# Altium PCB SOLOLINKER_GC2093.PcbDoc
Units mil, origin at the board's own origin, x right, y up, seen from the top; angles counter-clockwise.
Board outline 1181.1 x 866.14 mil, 2 copper layers (Top Layer, Bottom Layer); 21 components, 23 nets, 90 pads, 65 vias.
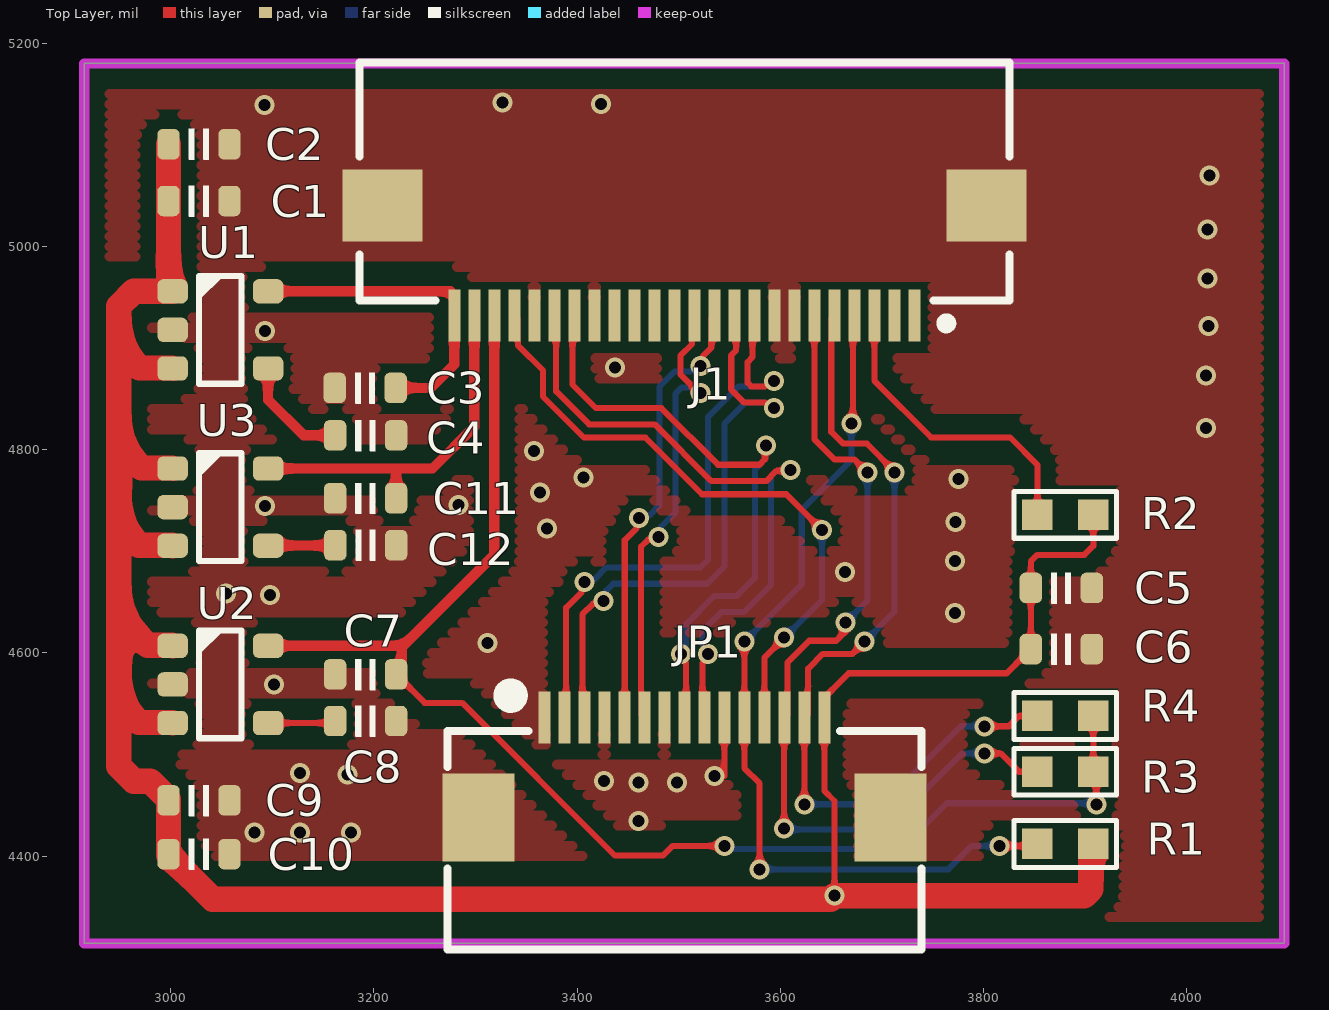
[diagram p0: Top Layer view]
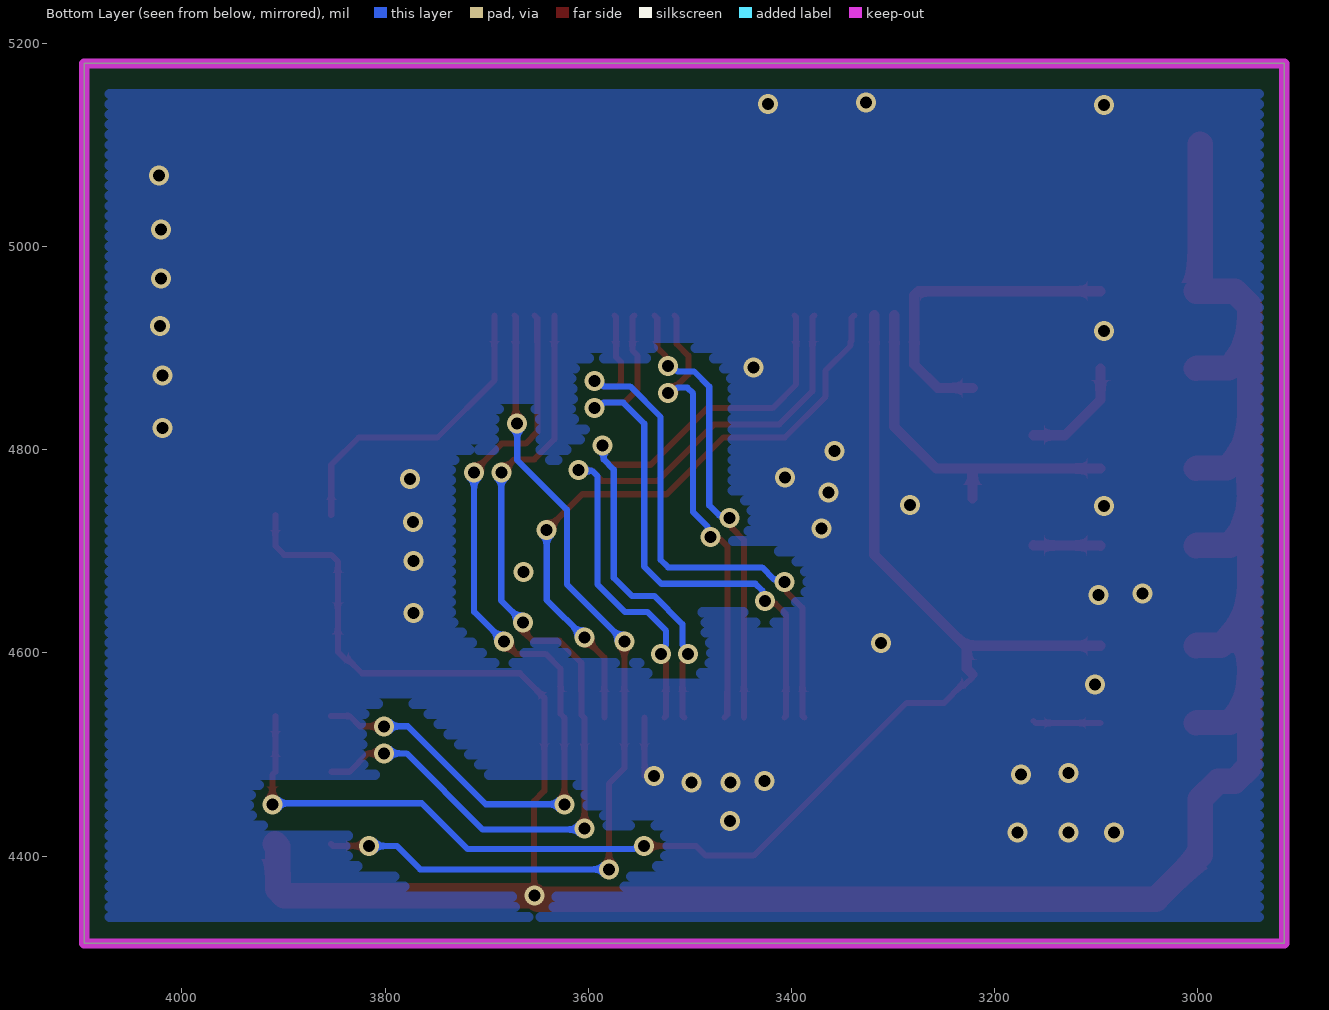
[diagram p1: Bottom Layer view, seen from below]
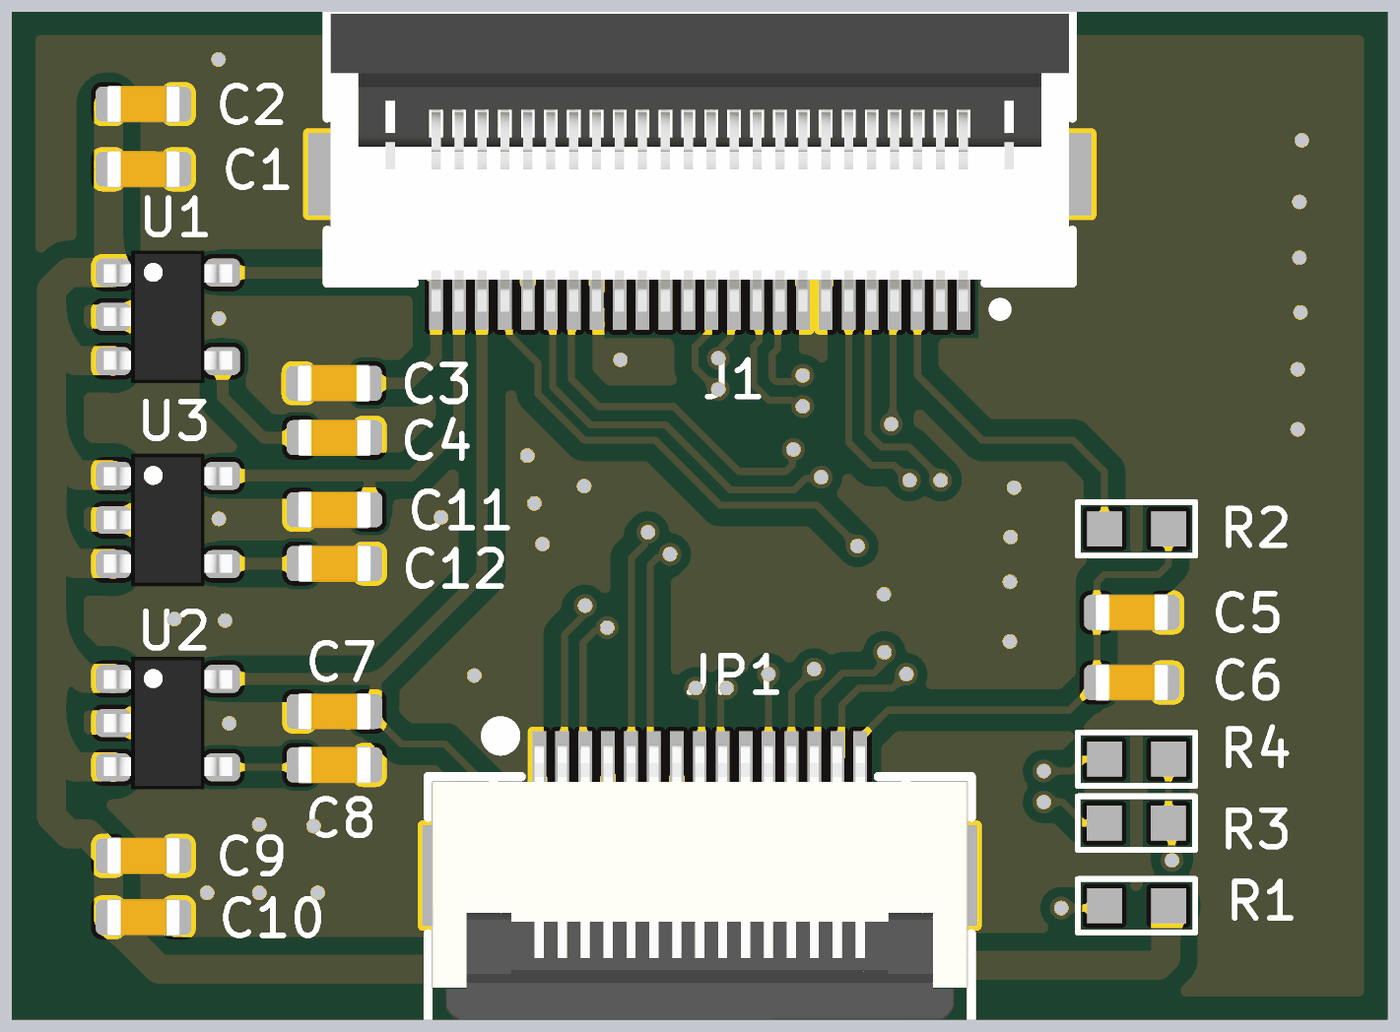
[diagram p2: 3D render of the assembled board from above, using the file's embedded part models]

## Layer stack, top to bottom
Top Solder: solder mask 0.4, Solder Resist, Dk 3.5
Top Layer: signal copper 1.4
Dielectric 1: dielectric 12.6, FR-4, Dk 4.8
Bottom Layer: signal copper 1.4
Bottom Solder: solder mask 0.4, Solder Resist, Dk 3.5

## Board outline
2915,4314 4096.1,4314 4096.1,5180.14 2915,5180.14

## Design rules (kind name [scope] priority, off if disabled: settings)
Clearance [All] p1: gap=7 ignorepadtopadclearanceinfootprint=TRUE except(0: SMDPad-Hole THPad-Hole Via-Hole Fill-Hole Poly-Hole Region-Hole Text-Hole; 15: Track-Poly Poly-Poly)
ComponentClearance ComponentClearance_1 [All] p1: gap=10 collisioncheckmode=3 verticalgap=10 showdistances=FALSE
ComponentClearance ComponentClearance_oled [InComponent('OLED1')] p2: gap=0 collisioncheckmode=3 verticalgap=0 showdistances=FALSE
DiffPairsRouting [All] p1: maxlimit=10 minlimit=6 mostfreqgap=10 toplayer_minwidth=6 toplayer_maxwidth=15 toplayer_prefwidth=10 bottomlayer_minwidth=6 bottomlayer_maxwidth=15 bottomlayer_prefwidth=10 maxuncoupledlength=500
HoleSize [All] p1: absolutevalues=TRUE maxlimit=200 minlimit=10 maxpercent=80.000 minpercent=20.000
HoleToHoleClearance [All] p1: gap=7 allowstackedmicrovias=TRUE
MinimumSolderMaskSliver [All] p1: minsoldermaskwidth=7
PlaneConnect [All] p1: planeconnectstyle=Direct reliefexpansion=20 reliefentries=4 reliefconductorwidth=10 reliefairgap=10
PolygonConnect PolygonConnect_1 [All] p1: connectstyle=Direct reliefconductorwidth=10 reliefentries=4 polygonreliefangle="90 Angle" airgapwidth=10
PolygonConnect PolygonConnect_power [InNet('Vbus')] p2: connectstyle=Direct reliefconductorwidth=10 reliefentries=4 polygonreliefangle="90 Angle" airgapwidth=10
RoutingVias [All] p1: holewidth=11.81 width=19.68 viastyle="Through Hole" minholewidth=11.81 minwidth=19.68 maxholewidth=11.81 maxwidth=100
SilkToSilkClearance [All] p1: silktosilkclearance=7
SilkToSolderMaskClearance [IsPad] p1: minsilkscreentomaskgap=7 clearancetoexposedcopper=TRUE
SolderMaskExpansion [All] p1: expansion=4 istentingtop=FALSE
UnRoutedNet [All] p1: checkbadconnections=TRUE
Width [All] p1: maxlimit=50 minlimit=6 preferedwidth=10
21 further rules are at their usual default settings.

## Classes and differential pairs
differential pair MIPI_RD3: +MIPI_RD3_P -MIPI_RD3_N
differential pair MIPI_RD2: +MIPI_RD2_P -MIPI_RD2_N
differential pair MIPI_RD1: +MIPI_RD1_P -MIPI_RD1_N
differential pair MIPI_RD0: +MIPI_RD0_P -MIPI_RD0_N
differential pair MIPI_RCLK: +MIPI_RCLK_P -MIPI_RCLK_N

## Components (designator, comment, footprint, x,y, rotation, side; value= is the part's Value field where it differs from the comment)
C1 "C0603" CAP_0603 3027.86,5044.77 r180 top value=10uF
C2 "C0603" CAP_0603 3027.86,5100.67 r180 top value=1uF
C3 "C0603" CAP_0603 3191.42,4860.88 r0 top value=10uF
C4 "C0603" CAP_0603 3191.86,4814.16 r180 top value=10nF
C5 "C0603" CAP_0603 3876.6,4664.01 r180 top value=10uF
C6 "C0603" CAP_0603 3876.6,4603.79 r180 top value=1uF
C7 "C0603" CAP_0603 3191.86,4578.9 r0 top value=10uF
C8 "C0603" CAP_0603 3191.86,4532.98 r180 top value=10nF
C9 "C0603" CAP_0603 3027.86,4454.92 r180 top value=10uF
C10 "C0603" CAP_0603 3027.86,4401.94 r180 top value=1uF
C11 "C0603" CAP_0603 3191.86,4752.23 r0 top value=10uF
C12 "C0603" CAP_0603 3192,4706 r180 top value=10nF
J1 "687124149022" 687124149022 3505.55,5064.16 r180 top
JP1 "FPC1.0-15P" "FPC0.5 2H-WS-15P" 3505.55,4437.94 r0 top
R1 "Res_0402" 0603R 3853.1,4411.97 r0 top value=?K
R2 "Res_0402" 0603R 3853.1,4735.82 r0 top value=?K
R3 "Res_0402" 0603R 3853,4483 r0 top value=?K
R4 "Res_0402" 0603R 3853.1,4537.93 r0 top value=?K
U1 "RT9193-3v3" SOT23-5 3048.86,4917.95 r0 top
U2 "RT9193-3v3" SOT23-5 3048.86,4568.98 r0 top
U3 "RT9193-3v3" SOT23-5 3048.86,4743.46 r0 top

## Footprints (in the part's own frame and the unit in brackets; to place one, negate y for a bottom-side part, rotate by r counter-clockwise, add the part's x,y. Pads: shape width x height; smd on the part's side, far side on the other; paste and mask are expansions set on the pad)
0603R [mil] "0603"
  rect 30x30 smd: 1(0,0) 2(55,0)
  silkscreen extent -23,-23 78,23, body extent -4,-15 59,15, height 19
687124149022 [mm] "0.50mm SMT ZIF Horizontal Hinge Type Bottom Contact, 24p"
  rect 0.3x1.3 smd: 1(-5.75,3.35) 2(-5.25,3.35) 3(-4.75,3.35) 4(-4.25,3.35) 5(-3.75,3.35) 6(-3.25,3.35) 7(-2.75,3.35) 8(-2.25,3.35) 9(-1.75,3.35) 10(-1.25,3.35) 11(-0.75,3.35) 12(-0.25,3.35) 13(0.25,3.35) 14(0.75,3.35) 15(1.25,3.35) 16(1.75,3.35) 17(2.25,3.35) 18(2.75,3.35) 19(3.25,3.35) 20(3.75,3.35) 21(4.25,3.35) 22(4.75,3.35) 23(5.25,3.35) 24(5.75,3.35)
  rect 2x1.8 smd: M1(-7.55,0.6) M2(7.55,0.6)
  silkscreen extent -8.12,-2.98 8.13,3.67, body extent -8.05,-2.9 8.05,3.6, height 2.25
CAP_0603 [mil]
  rrect50% 22x30 smd: 1(-30,0) 2(30,0)
  silkscreen extent -10,-15 10,15, body extent -31,-16 31,16, height 31
"FPC0.5 2H-WS-15P" [mm] "长：11.7mm，宽：5.2mm，高：2mm"
  rect 1.8x2.2 smd: 0(-5.15,0) 0(5.15,0)
  rect 0.3x1.3 smd: 1(-3.5,2.497) 2(-3,2.497) 3(-2.5,2.497) 4(-2,2.497) 5(-1.5,2.497) 6(-1,2.497) 7(-0.5,2.497) 8(0,2.497) 9(0.5,2.497) 10(1,2.497) 11(1.5,2.497) 12(2,2.497) 13(2.5,2.497) 14(3,2.497) 15(3.5,2.497)
  silkscreen extent -5.93,-3.3 5.93,3.23, body extent -5.85,-3.15 5.85,2.85, height 2
SOT23-5 [mil]
  rrect50% 30x24 smd: 1(-47,38) 2(-47,0) 3(-47,-38) 4(47,-38) 5(47,38)
  silkscreen extent -21,-53 21,53, body extent -55,-57 55,57, height 57

## Part data
C1 C2 C3 C4 C5 C6 C7 C8 C9 C10 C11 C12: "Ceramic Chip Capacitor - Standard", PackageDocument=Mar-2001, Code_IPC="1608 [0603]", Code_JEITA=0603, ComponentLink1Description="Manufacturer Link", ComponentLink1URL=http://www.kemet.com/, ComponentLink2Description=Datasheet, ComponentLink2URL=http://www.kemet.com/kemet/web/homepage/kechome.nsf/vapubfilesname/F3102TA.pdf/$file/F3102TA.pdf, DatasheetDocument=Mar-2001, LatestRevisionDate=19-Mar-2004, LatestRevisionNote="Silkscreen size reduced.", Note="Footprint corresponds to dimensions for bulk cassette packaging. This case size has tightened tolerances.", PackageReference=0603, Published=17-Jul-2002, Publisher="Altium Limited"
J1: library part CMP-1502-01633-2
JP1: library part FPC-15P, "FPC连接器", BOM名称=FPC连接器, 学习资源=www.ooocke.com, 版权归属=源创客
R1 R2 R3 R4: "Resistor"
U1 U2 U3: library part RT9193, "Power"

## Via types
v1: diameter 19.68, hole 11.81, Top Layer to Bottom Layer, tented both sides, 65 vias

## Nets (pads, with @x,y where several pads share a name; then routed paths per layer and width w, separated by ;. In a path a pad name is that pad's centre, name@x,y a point inside that pad or via, vN(x,y) a via of type N, cw(c..) or ccw(c..) an arc to the next point about the centre after c; other vN are vias at no path point)
AVDD_2V8: C3.2 J1.24 U1.5 | length 320.4
  Top Layer w10: U1.5 3275.18,4955.95 3279.17,4951.95 J1.24 3279.17,4883.81 3256.24,4860.88 C3.2
DOVDD_2V8: C7.2 J1.22 R3.2 R4.2 U2.5 | length 1403.7
  Top Layer w6: C7.2 3221.86,4576.26 3229.67,4568.45 3232.32,4568.45 3249.88,4550.89 3286.86,4550.89 3437.31,4400.44 3484.52,4400.44 3494.09,4410 v1(3545,4410) ; R4.2 3908.1,4483.1 R3.2 3911,4480 v1(3911,4451)
  Top Layer w10: U2.5 3228.98,4606.98 ; C7.2 3227.55,4584.6 3227.55,4605.55 3228.98,4606.98 ; J1.22 3318.54,4696.54 3228.98,4606.98
  Bottom Layer w6: v1(3545,4410) 3547.62,4407.38 3554.82,4407.38 3555.36,4406.84 3718.84,4406.84 3764,4452 3910,4452 v1(3911,4451)
DVDD_1V2: C11.2 J1.23 U3.5 | length 359
  Top Layer w10: U3.5 3222,4781.46 ; C11.2 3221.86,4781.33 3222,4781.46 ; J1.23 3298.86,4822.61 3257.71,4781.46 3222,4781.46
GND: C1.1 C2.1 C3.1 C4.1 C5.1 C6.1 C7.1 C8.1 C9.1 C10.1 C11.1 C12.1 J1.7 J1.8 J1.17 J1.20 J1.M1 J1.M2 JP1.0 JP1.1 JP1.4 JP1.7 JP1.10 U1.2 U2.2 U3.2 | length 67.2
  Top Layer w6: v1(3535.25,4478.69) 3544.92,4478.69 JP1.10
  other v1: 3082.5,4423.07 3127.34,4423.07 3177.5,4423.07 3460.5,4434.69 3460.25,4472.38 3498.55,4472.38 3426.5,4473.69 3174,4480.48 3127.34,4481.79 3101.5,4568.69 3311.97,4609.79 3771.92,4639.08 3098,4657.07 3054.36,4658.38 3663.64,4679.63 3771.92,4690.32 3370.5,4722.69 3772.49,4728.75 3092.62,4744.38 3283.36,4745.69 3363.5,4757.69 3775.42,4771.22 3406.25,4772.53 3357.5,4798.69 4019,4821.3 4019,4872.87 3437.45,4881.09 3092.62,4916.64 4021.45,4921.79 4020.5,4968.69 4020.5,5016.69 4022.5,5069.69 3092.36,5139.07 3423.31,5140.38 3326.5,5141.69
MCLK: J1.21 JP1.12 | length 629.2
  Top Layer w6: J1.21 3341.13,4929.36 3341.13,4907.04 3342.01,4906.16 3342.01,4902.53 3366.44,4878.1 3366.44,4852.17 3406.61,4812 3467.12,4812 3522.96,4756.16 3605.84,4756.16 v1(3641,4721) ; JP1.12 3584.29,4595.31 3603.7,4614.73 v1(3603.7,4615.27)
  Bottom Layer w6: v1(3603.7,4615.27) 3604.25,4615.27 3641,4652.02 v1(3641,4721)
MIPI_RCLK_N: J1.18 JP1.8 | length 625.7
  Top Layer w6: J1.18 3395.44,4930.43 3395.44,4864.19 3418.63,4841 3482.91,4841 3538.75,4785.16 3579.66,4785.16 3584.93,4790.42 3584.93,4802.93 v1(3586,4804) ; v1(3502.05,4599) 3502.05,4595.3 3507.39,4589.95 3507.39,4576.28 3507.39,4538.09 JP1.8
  Bottom Layer w6: v1(3502.05,4599) 3502.05,4602.7 3507.39,4608.05 3507.39,4628.35 3535.12,4656.07 3557.23,4656.07 3574.98,4673.82 3574.98,4780.47 3584.93,4790.42 3584.93,4802.93 v1(3586,4804)
MIPI_RCLK_P: J1.19 JP1.9 | length 652.2
  Top Layer w6: J1.19 3379.44,4930.43 3379.44,4857.56 3412,4825 3476.28,4825 3532.13,4769.16 3586.29,4769.16 3596.24,4779.11 3608.75,4779.11 v1(3609.82,4780.18) ; JP1.9 3523.39,4538.09 3523.39,4569.65 3523.39,4589.95 3528.74,4595.3 v1(3528.74,4599)
  Bottom Layer w6: v1(3528.74,4599) 3528.74,4602.7 3523.39,4608.05 3523.39,4621.72 3541.75,4640.07 3563.85,4640.07 3590.98,4667.2 3590.98,4773.84 3596.24,4779.11 3608.75,4779.11 v1(3609.82,4780.18)
MIPI_RD0_N: J1.9 JP1.2 | length 592.1
  Top Layer w6: JP1.2 3389.28,4538.09 3389.28,4644.47 3404.51,4659.7 3404.51,4667.25 v1(3407.13,4669.87) ; J1.9 3572.61,4930.43 3572.61,4891.05 3567.77,4886.21 3567.77,4865.86 3571.28,4862.34 3584.95,4862.34 3590.3,4867.69 v1(3594,4867.69)
  Bottom Layer w6: v1(3407.13,4669.87) 3409.75,4672.49 3417.3,4672.49 3428.92,4684.1 3521.47,4684.1 3529,4691.63 3529,4832.38 3558.96,4862.34 3584.95,4862.34 3590.3,4867.69 v1(3594,4867.69)
MIPI_RD0_P: J1.10 JP1.3 | length 592.1
  Top Layer w6: JP1.3 3405.28,4538.09 3405.28,4637.84 3415.83,4648.38 3423.38,4648.38 v1(3426,4651) ; J1.10 3556.61,4930.43 3556.61,4897.68 3551.77,4892.84 3551.77,4859.23 3564.65,4846.34 3584.95,4846.34 3590.3,4841 v1(3594,4841)
  Bottom Layer w6: v1(3426,4651) 3428.62,4653.62 3428.62,4661.17 3435.55,4668.1 3528.1,4668.1 3545,4685 3545,4825.76 3565.59,4846.34 3584.95,4846.34 3590.3,4841 v1(3594,4841)
MIPI_RD1_N: J1.11 JP1.5 | length 448.4
  Top Layer w6: JP1.5@3446.9,4536.65 3446.9,4711.08 3458.51,4722.7 3458.51,4730.25 v1(3461.13,4732.87) ; v1(3521.47,4882.4) 3524.09,4885.02 3524.09,4892.39 3532.17,4900.47 3532.17,4929.36 J1.11
  Bottom Layer w6: v1(3461.13,4732.87) 3463.75,4735.49 3471.3,4735.49 3480.97,4745.16 3480.97,4862.03 3496,4877.06 3512.43,4877.06 3517.77,4882.4 v1(3521.47,4882.4)
MIPI_RD1_P: J1.12 JP1.6 | length 459.4
  Top Layer w6: JP1.6 3463.28,4539.15 3463.28,4561.97 3462.9,4562.35 3462.9,4704.45 3469.83,4711.38 3477.38,4711.38 v1(3480,4714) ; J1.12 3513.14,4930.01 3513.14,4904.06 3501.63,4892.55 3501.63,4874.18 3520.1,4855.72 v1(3521.47,4855.72)
  Bottom Layer w6: v1(3480,4714) 3482.62,4716.62 3482.62,4724.17 3496.97,4738.53 3496.97,4855.4 3502.63,4861.06 3512.43,4861.06 3517.77,4855.72 v1(3521.47,4855.72)
MIPI_RD2_N: J1.13
MIPI_RD2_P: J1.14
MIPI_RD3_N: J1.15
MIPI_RD3_P: J1.16
NetC4_2: C4.2 U1.4 | length 111.3
  Top Layer w10: U1.4 3095.86,4849.14 3130.84,4814.16 C4.2
NetC8_2: C8.2 U2.4 | length 66.8
  Top Layer w6: U2.4 3159.86,4530.98 C8.2
NetC12_2: C12.2 U3.4 | length 66.4
  Top Layer w10: U3.4 3096.13,4705.73 3161.73,4705.73 C12.2
PWDN: J1.3 R2.1 | length 308.5
  Top Layer w6: J1.3 3692.56,4867.92 3748.48,4812 3826.16,4812 3853.1,4785.06 R2.1
RST: J1.4 JP1.11 R1.1 | length 880.1
  Top Layer w6: v1(3564.61,4611) JP1.11 3564.61,4486.67 3579.66,4471.62 v1(3579.66,4387) ; v1(3670,4825.76) 3671.44,4827.19 3671.44,4930.83 J1.4 ; v1(3816,4410) 3851.13,4410 R1.1
  Bottom Layer w6: v1(3564.61,4611) 3621.16,4667.55 3621.16,4740.99 3670,4789.84 v1(3670,4825.76) ; v1(3579.66,4387) 3765.48,4387 3788.48,4410 v1(3816,4410)
SCL: J1.6 JP1.13 R3.1 | length 875.9
  Top Layer w6: v1(3603.7,4427.13) 3603.84,4427.27 3603.84,4536.11 3606.88,4539.15 3606.88,4562.25 3606.98,4562.35 3606.98,4590.49 3628.49,4612 3654.88,4612 3664.13,4621.25 v1(3664.13,4629.87) ; J1.6 3633.5,4810.11 3653.19,4790.42 3672.77,4790.42 v1(3685.71,4777.48) ; v1(3801,4501.08) 3816.92,4501.08 3835,4483 R3.1
  Bottom Layer w6: v1(3603.7,4427.13) 3604.68,4426.16 3704,4426.16 3778.92,4501.08 v1(3801,4501.08) ; v1(3664.13,4629.87) 3685.71,4651.45 v1(3685.71,4777.48)
SDA: J1.5 JP1.14 R4.1 | length 841.3
  Top Layer w6: v1(3623.68,4451) JP1.14 3627.44,4540.02 3627.44,4584.42 3642.02,4599 3671,4599 v1(3683,4611) ; J1.5 3650.28,4929.36 3650.28,4906.29 3650.16,4906.16 3650.16,4817.54 3661.78,4805.91 3685.34,4805.91 3712.39,4778.86 v1(3712.39,4777.48) ; v1(3801,4527.77) 3824.93,4527.77 3835.1,4537.93 R4.1
  Bottom Layer w6: v1(3623.68,4451) 3701,4451 3777.77,4527.77 v1(3801,4527.77) ; v1(3683,4611) 3712.39,4640.39 v1(3712.39,4777.48)
VCC_3V3: C1.2 C2.2 C5.2 C6.2 C9.2 C10.2 JP1.15 R1.2 R2.2 U1.1 U1.3 U2.1 U2.3 U3.1 U3.3 | length 2669.1
  Top Layer w6: v1(3653.19,4361) 3653.35,4361.16 3653.35,4454.22 3643.35,4464.22 JP1.15 3643.35,4555.93 3667.42,4580 3822.81,4580 3836.14,4593.33 3838.79,4593.33 3846.6,4601.14 C6.2 C5.2 3846.6,4690.04 3853.1,4696.54 3899.36,4696.54 3908.1,4705.29 R2.2
  Top Layer w25: C2.2 C1.2 2997.86,4957.95 U1.1@2999.86,4955.95 ; U2.3 3001.36,4531.48 2968.41,4531.48 2949,4550.89 ; U2.1 3001.36,4607.48 2977.42,4607.48 2949,4635.9 ; U3.3 3001.36,4705.96 2968.76,4705.96 2949,4725.73 ; U3.1 3001.36,4781.96 2971.04,4781.96 2949,4804 ; U1.3 3001.36,4880.45 2969.02,4880.45 2949,4900.47 ; U1.1 U1.1@2999.86,4955.95 ; R1.2 3905.6,4409.47 3905.6,4367.25 3899.36,4361 v1(3653.19,4361) 3649.85,4357.66 3041.14,4357.66 2997.86,4400.94 C9.2 2997.86,4455.92 2979.94,4473.84 2963.64,4473.84 2949,4488.48 2949,4550.89 ; 2949,4550.89 2949,4635.9 ; 2949,4635.9 2949,4725.73 ; 2949,4725.73 2949,4804 ; 2949,4804 2949,4900.47 ; 2949,4900.47 2949,4941.3 2963.64,4955.95 U1.1@2999.86,4955.95
pads on no net: J1.1 J1.2

## Polygon pours and split planes (outlines as drawn)
GND on Bottom Layer "NONET_L01_P-001" (hatched Horizontal grid 10 track 10, remove dead copper, pour order 1): 2915,5180 2915,4314 4096,4314 4096,5180
GND on Top Layer "NONET_L01_P-001" (hatched Horizontal grid 10 track 10, remove dead copper, pour order 0): 2915,5180 2915,4314 4096,4314 4096,5180

## Keep-outs
Keep-Out Layer:
  the board outline again, w10